# Altium PCB CAM_PW_V100.PcbDoc
Units mm, origin at the board's own origin, x right, y up, seen from the top; angles counter-clockwise.
Board outline 28.5 x 47.5 mm, 2 copper layers (Top Layer, Bottom Layer), stack 0.835 mm thick; 59 components, 53 nets, 239 pads, 33 vias.
Unrouted connection lines stored in the file: 136.
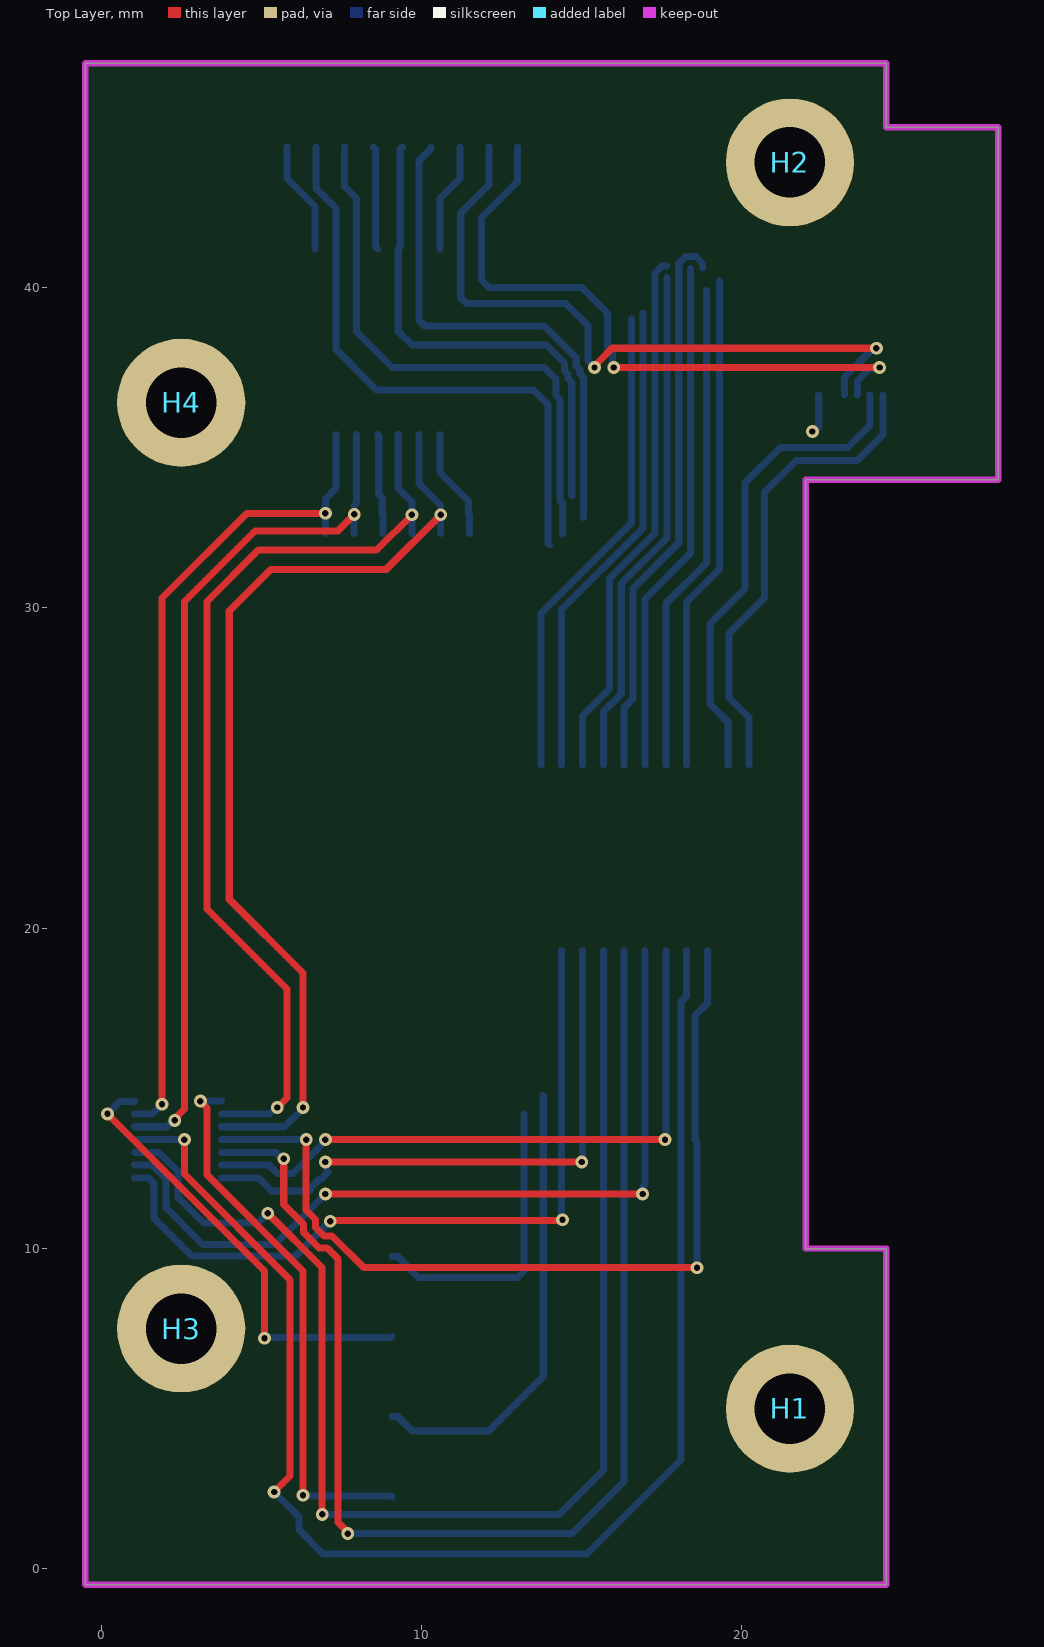
[diagram p0: Top Layer view]
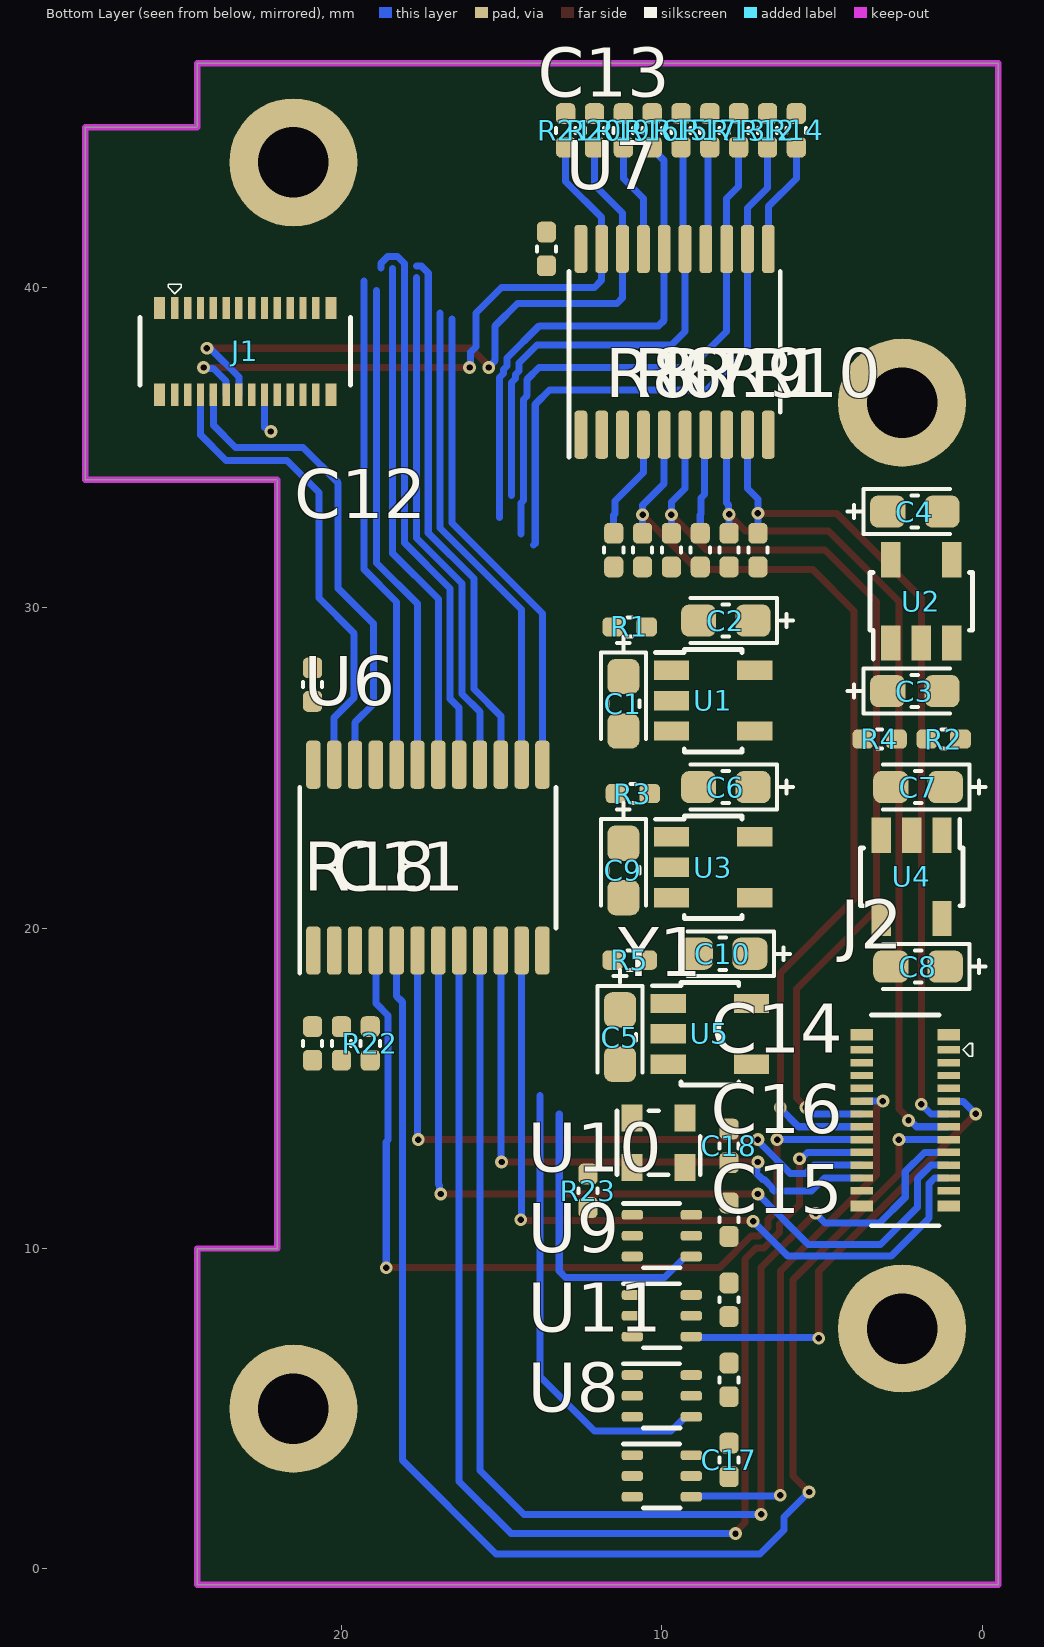
[diagram p1: Bottom Layer view, seen from below]

## Layer stack, top to bottom
Top Solder: solder mask 0.0102, Solder Resist, Dk 3.5
Top Layer: signal copper 0.0175
Dielectric 1: dielectric 0.8, FR-4, Dk 4.8
Bottom Layer: signal copper 0.0175
Bottom Solder: solder mask 0.0102, Solder Resist, Dk 3.5

## Board outline
-0.5,-0.5 -0.5,47 24.5,47 24.5,45 28,45 28,34 22,34 22,10 24.5,10 24.5,-0.5

## Design rules (kind name [scope] priority, off if disabled: settings)
Clearance [All] p1: gap=0.15 ignorepadtopadclearanceinfootprint=FALSE
HoleToHoleClearance [All] p1: gap=0.12 allowstackedmicrovias=TRUE
MinimumSolderMaskSliver [All] p1: minsoldermaskwidth=0.12
PolygonConnect [All] p1: connectstyle=Relief reliefconductorwidth=0.254 reliefentries=4 polygonreliefangle="90 Angle" airgapwidth=0.254
RoutingVias [All] p1: holewidth=0.2 width=0.4 viastyle="Through Hole" minholewidth=0.2 minwidth=0.4 maxholewidth=0.2 maxwidth=0.4
SilkToSilkClearance [All] p1: silktosilkclearance=0.12
SilkToSolderMaskClearance [IsPad] p1: minsilkscreentomaskgap=0.1 clearancetoexposedcopper=TRUE
SolderMaskExpansion [All] p1: expansion=0.102 istentingtop=FALSE
SupplyNets "Schematic Supply Nets_7" [InNet('+5V_CAM')] p1: voltage=0.000
SupplyNets "Schematic Supply Nets_6" [InNet('GND')] p2: voltage=0.000
SupplyNets "Schematic Supply Nets_5" [InNet('+1.05V')] p3: voltage=0.000
SupplyNets "Schematic Supply Nets_3" [InNet('+1.8V')] p4: voltage=0.000
SupplyNets "Schematic Supply Nets_2" [InNet('+3.3V')] p5: voltage=0.000
SupplyNets "Schematic Supply Nets_1" [InNet('+2.8V')] p6: voltage=0.000
SupplyNets "Schematic Supply Nets" [InNet('+2.4V')] p7: voltage=0.000
Width [All] p1: maxlimit=0.4 minlimit=0.15 preferedwidth=0.22
26 further rules are at their usual default settings.

## Components (designator, comment, footprint, x,y, rotation, side; value= is the part's Value field where it differs from the comment)
C1 "4.7uF/10V" CAP_MP_1608X90 11.2,27 r270 bottom
C2 "4.7uF/10V" CAP_MP_1608X90 8,29.6 r0 bottom
C3 "4.7uF/10V" CAP_MP_1608X90 2.1,27.4 r180 bottom
C4 "4.7uF/10V" CAP_MP_1608X90 2.1,33 r180 bottom
C5 "4.7uF/10V" CAP_MP_1608X90 11.3,16.6 r270 bottom
C6 "4.7uF/10V" CAP_MP_1608X90 8,24.4 r0 bottom
C7 "4.7uF/10V" CAP_MP_1608X90 2,24.4 r0 bottom
C8 "4.7uF/10V" CAP_MP_1608X90 2,18.8 r0 bottom
C9 "4.7uF/10V" CAP_MP_1608X90 11.2,21.8 r270 bottom
C10 "4.7uF/10V" CAP_MP_1608X90 8.1,19.2 r0 bottom
C11 "0.22uF/16V" CAP_C_1005X60 20,16.4 r90 bottom value=33pF
C12 "0.22uF/16V" CAP_C_1005X60 20.9,27.6 r270 bottom value=33pF
C13 "0.22uF/16V" CAP_C_1005X60 13.6,41.2 r90 bottom value=33pF
C14 "0.22uF/16V" CAP_C_1005X60 7.9,10.9 r270 bottom value=33pF
C15 "0.22uF/16V" CAP_C_1005X60 7.9,5.9 r270 bottom value=33pF
C16 "0.22uF/16V" CAP_C_1005X60 7.9,8.4 r270 bottom value=33pF
C17 "0.22uF/16V" CAP_C_1005X60 7.9,3.4 r270 bottom value=33pF
C18 "0.22uF/16V" CAP_C_1005X60 7.9,13.2 r270 bottom value=33pF
H1 "M2" HEX-2.2mm 21.5,5 r0 top locked
H2 "M2" HEX-2.2mm 21.5,43.9 r0 top locked
H3 "M2" HEX-2.2mm 2.5,7.5 r0 top locked
H4 "M2" HEX-2.2mm 2.5,36.4 r0 top locked
J1 "DF40C-24DP-0.4V51" CONN24_6P32X1P85_HDR_HIR 23,38 r0 bottom locked
J2 "DF40C-24DP-0.4V51" CONN24_6P32X1P85_HDR_HIR 2.4,14 r90 bottom locked
R1 "10k" RES_C_1005X40 11,29.4 r180 bottom
R2 "10k" RES_C_1005X40 1.2,25.9 r0 bottom
R3 "10k" RES_C_1005X40 10.9,24.2 r180 bottom
R4 "10k" RES_C_1005X40 3.2,25.9 r180 bottom
R5 "10k" RES_C_1005X40 11,19 r180 bottom
R6 "4.7k" RES_C_1005X40 10.6,31.8 r90 bottom
R7 "4.7k" RES_C_1005X40 9.7,31.8 r90 bottom
R8 "4.7k" RES_C_1005X40 11.5,31.8 r90 bottom
R9 "4.7k" RES_C_1005X40 7.9,31.8 r90 bottom
R10 "4.7k" RES_C_1005X40 7,31.8 r90 bottom
R11 "4.7k" RES_C_1005X40 8.8,31.8 r90 bottom
R12 "4.7k" RES_C_1005X40 6.7,44.9 r270 bottom
R13 "4.7k" RES_C_1005X40 7.6,44.9 r270 bottom
R14 "4.7k" RES_C_1005X40 5.8,44.9 r270 bottom
R15 "4.7k" RES_C_1005X40 9.4,44.9 r270 bottom
R16 "4.7k" RES_C_1005X40 10.3,44.9 r270 bottom
R17 "4.7k" RES_C_1005X40 8.5,44.9 r270 bottom
R18 "4.7k" RES_C_1005X40 20.9,16.4 r90 bottom
R19 "4.7k" RES_C_1005X40 11.2,44.9 r270 bottom
R20 "4.7k" RES_C_1005X40 12.1,44.9 r270 bottom
R21 "4.7k" RES_C_1005X40 13,44.9 r270 bottom
R22 "4.7k" RES_C_1005X40 19.1,16.4 r90 bottom
R23 "22R" RES_C_1005X40 12.3,11.8 r90 bottom
U1 "TLV75533PDBVR" SOT25 8.4,27.1 r180 bottom
U2 "TPS7A2024PDBVR" SOT25 1.9,30.2 r90 bottom
U3 "TLV75528PDBVR" SOT25 8.4,21.9 r180 bottom
U4 "AP7347DQ-105W5-7" SOT25 2.2,21.6 r270 bottom
U5 "TLV75518PDBVR" SOT25 8.5,16.7 r180 bottom
U6 "TCA6416APWR" SOP65P440W-24N 17.3,22.2 r90 bottom
U7 "PCA9544APW,118" SOP65P440W_20 9.6,38.3 r90 bottom
U8 "NL7SZ97DFT2G-Q" SC-88 10,2.9 r180 bottom
U9 "NL7SZ97DFT2G-Q" SC-88 10,7.9 r180 bottom
U10 "NL7SZ97DFT2G-Q" SC-88 10,10.4 r180 bottom
U11 "NL7SZ97DFT2G-Q" SC-88 10,5.4 r180 bottom
Y1 "DSC1001DL5-027.0000T" OSCDFN250X200X89-4N 10.1,13.3 r270 bottom

## Footprints (in the part's own frame and the unit in brackets; to place one, negate y for a bottom-side part, rotate by r counter-clockwise, add the part's x,y. Pads: shape width x height; smd on the part's side, far side on the other; paste and mask are expansions set on the pad)
CAP_C_1005X60 [mm]
  rrect50% 0.65x0.6 smd mask+0.05: 1(-0.525,0) 2(0.525,0)
  silkscreen extent -0.08,-0.3 0.08,0.3, body extent -0.5,-0.26 0.5,0.27, height 0.35
CAP_MP_1608X90 [mm] "Molded Capacitor, 2-Leads, Body 1.60x0.85mm, IPC Medium Density"
  rrect50% 1.1x1 smd mask+0.102: 1(-0.85,0) 2(0.85,0)
  silkscreen extent -2.1,-0.7 1.1,0.7, body extent -0.8,-0.43 0.8,0.43, height 1
CONN24_6P32X1P85_HDR_HIR [mm]
  rect 0.23x0.7 smd paste+0 mask+0: 1(2.2,-1.355) 2(2.2,1.355) 3(1.8,-1.355) 4(1.8,1.355) 5(1.4,-1.355) 6(1.4,1.355) 7(1,-1.355) 8(1,1.355) 9(0.6,-1.355) 10(0.6,1.355) 11(0.2,-1.355) 12(0.2,1.355) 13(-0.2,-1.355) 14(-0.2,1.355) 15(-0.6,-1.355) 16(-0.6,1.355) 17(-1,-1.355) 18(-1,1.355) 19(-1.4,-1.355) 20(-1.4,1.355) 21(-1.8,-1.355) 22(-1.8,1.355) 23(-2.2,-1.355) 24(-2.2,1.355)
  rect 0.35x0.7 smd paste-0.66 mask-0.66: 25(-2.675,1.355) 26(2.675,1.355) 27(-2.675,-1.355) 28(2.675,-1.355)
  silkscreen extent -3.29,-2.1 3.29,1.05, body extent -3.16,-1.48 3.16,1.49, height 1.14
HEX-2.2mm [mm]
  round 4 hole 2.2: 1(0,0)
OSCDFN250X200X89-4N [mm]
  rect 0.85x0.65 smd: 1(-0.775,0.825) 2(-0.775,-0.825) 3(0.775,-0.825) 4(0.775,0.825)
  silkscreen extent -1,-1.3 1,1.3, body extent -1.03,-1.27 1.03,1.27, height 0.89
RES_C_1005X40 [mm]
  rrect50% 0.65x0.6 smd mask+0.05: 1(-0.525,0) 2(0.525,0)
  silkscreen extent -0.08,-0.3 0.08,0.3, body extent -0.5,-0.25 0.5,0.25, height 0.38
SC-88 [mm] "6-TSSOP, SC-88, SOT-363 / SC-88/SC70-6/SOT-363"
  rrect50% 0.66x0.3 smd: 1(-0.92,0.65) 2(-0.92,0) 3(-0.92,-0.65) 4(0.92,-0.65) 5(0.92,0) 6(0.92,0.65)
  silkscreen extent -1.2,-1 0.58,1, body extent -1.05,-1 1.05,1, height 1.1
SOP65P440W-24N [mm] "TSSOP-24 4.40mm Width"
  rrect50% 1.5x0.45 smd: 1(-2.9,3.575) 2(-2.9,2.925) 3(-2.9,2.275) 4(-2.9,1.625) 5(-2.9,0.975) 6(-2.9,0.325) 7(-2.9,-0.325) 8(-2.9,-0.975) 9(-2.9,-1.625) 10(-2.9,-2.275) 11(-2.9,-2.925) 12(-2.9,-3.575) 13(2.9,-3.575) 14(2.9,-2.925) 15(2.9,-2.275) 16(2.9,-1.625) 17(2.9,-0.975) 18(2.9,-0.325) 19(2.9,0.325) 20(2.9,0.975) 21(2.9,1.625) 22(2.9,2.275) 23(2.9,2.925) 24(2.9,3.575)
  silkscreen extent -3.6,-4 2.2,4, body extent -3.2,-3.9 3.2,3.9, height 1.2
SOP65P440W_20 [mm] "TSSOP 20 4.40mm Width"
  rrect50% 1.5x0.4 smd paste+0 mask+0: 1(-2.9,2.925) 2(-2.9,2.275) 3(-2.9,1.625) 4(-2.9,0.975) 5(-2.9,0.325) 6(-2.9,-0.325) 7(-2.9,-0.975) 8(-2.9,-1.625) 9(-2.9,-2.275) 10(-2.9,-2.925) 11(2.9,-2.925) 12(2.9,-2.275) 13(2.9,-1.625) 14(2.9,-0.975) 15(2.9,-0.325) 16(2.9,0.325) 17(2.9,0.975) 18(2.9,1.625) 19(2.9,2.275) 20(2.9,2.925)
  silkscreen extent -3.6,-3.3 2.2,3.3, body extent -3.3,-3.3 3.3,3.3, height 1.09
SOT25 [mm]
  rect 1.1x0.6 smd paste+0 mask+0: 1(-1.3,0.95) 2(-1.3,0) 3(-1.3,-0.95) 4(1.3,-0.95) 5(1.3,0.95)
  silkscreen extent -1.8,-1.6 0.9,1.6, body extent -1.43,-1.5 1.43,1.5, height 1.4

## Part data
C1 C2 C3 C4 C5 C6 C7 C8 C9 C10: library part CAP_TH, "CAP_Polarization", LatestRevisionDate=17-Jul-2002, LatestRevisionNote="Re-released for DXP Platform.", PackageReference=POLAR0.8, Published=8-Jun-2000, Publisher="Altium Limited"
C11 C12 C13 C14 C15 C16 C17 C18: library part CAP_SMD, "CAP_Chip"
H1 H2 H3 H4: library part HEX-M3
J1 J2: "No Description Available", Mfr_Name=Hirose, RefDes=RefDes, TYPE=Type
R1 R2 R3 R4 R5 R6 R7 R8 R9 R10 R11 R12 R13 R14 R15 R16 R17 R18 R19 R20 R21 R22 R23: library part RES-SMD, "RES-Chip", Manufacturer="Generic Components", Class=Passive, Published=08/06/2000, Publisher="Altium Hobart Technology Centre"
U1 U2 U3 U4 U5: library part IC_POWER_AP7347DQ
U6: library part IC_I2Cto16IO_TCA6416APWR
U7: library part IC_I2CSW1to4_PCA9544APW,118
U8 U9 U10 U11: library part IC_FLEXLOGIC_NL7SZ97DFT2G-Q
Y1: library part Y_OSC27MHz_DSC1001DL5-027.0000T

## Via types
v1: diameter 0.4, hole 0.2, Top Layer to Bottom Layer, 33 vias

## Nets (pads, with @x,y where several pads share a name; then routed paths per layer and width w, separated by ;. In a path a pad name is that pad's centre, name@x,y a point inside that pad or via, vN(x,y) a via of type N, cw(c..) or ccw(c..) an arc to the next point about the centre after c; other vN are vias at no path point)
+1.05V: C8.1 J2.6 J2.8 U4.5
+1.8V: C10.1 C12.2 C14.2 C15.2 C16.2 C17.2 J2.2 J2.4 U5.5 U6.24 U8.5 U9.5 U10.5 U11.5
+2.4V: C4.1 C13.2 R6.1 R7.1 R8.1 R9.1 R10.1 R11.1 R12.1 R13.1 R14.1 R15.1 R16.1 R17.1 R19.1 R20.1 R21.1 U2.5 U7.20
+2.8V: C6.1 J2.1 J2.3 U3.5
+3.3V: C2.1 C3.1 C7.1 C11.2 C18.2 R2.2 R4.2 R18.1 R22.1 U1.5 U2.1 U4.1 U6.2 Y1.1 Y1.4
+5V_CAM: C1.1 C5.1 C9.1 J1.2 J1.4 R1.2 R3.2 R5.2 U1.1 U3.1 U5.1
CAM_SCL: J1.12 R20.2 U7.18 | length 21.8
  Top Layer w0.22: v1(15.4,37.5) 15.4,37.549 15.54,37.689 15.54,37.691 15.949,38.1 v1(24.2,38.1)
  Bottom Layer w0.22: R20.2 12.1,43.2 11.225,42.325 U7.18 11.225,39.675 11.4,39.5 14.5,39.5 15.2,38.8 15.2,37.719 15.4,37.519 v1(15.4,37.5) v1@15.43,37.47 ; J1.12 23.2,37.201 24.099,38.1 v1(24.2,38.1)
CAM_SDA: J1.10 R21.2 U7.19 | length 20.4
  Top Layer w0.22: v1(16,37.5) v1(24.3,37.5)
  Bottom Layer w0.22: R21.2 13,43.3 11.875,42.175 U7.19 11.875,40.225 12.1,40 15,40 15.8,39.2 15.8,38.14 15.966,37.974 15.966,37.534 v1(16,37.5) ; J1.10 23.605,36.65 23.605,37.083 23.988,37.466 24.266,37.466 v1(24.3,37.5)
CM4_SCL: J1.8 U6.22 | length 15.1
  Bottom Layer w0.22: U6.22 19.575,26.425 19,27 19,29.5 20.1,30.6 20.1,33.9 21.2,35 23.3,35 23.995,35.695 23.995,36.64 J1.8
CM4_SDA: J1.6 U6.23 | length 14.9
  Bottom Layer w0.22: U6.23 20.225,26.575 19.6,27.2 19.6,29.2 20.7,30.3 20.7,33.6 21.7,34.6 23.6,34.6 24.4,35.4 J1.6
GND: C1.2 C2.2 C3.2 C4.2 C5.2 C6.2 C7.2 C8.2 C9.2 C10.2 C11.1 C12.1 C13.1 C14.1 C15.1 C16.1 C17.1 C18.1 J1.1 J1.3 J1.14 J1.19 J2.5 J2.7 J2.23 J2.24 U1.2 U2.2 U3.2 U4.2 U5.2 U6.12 U6.21 U7.1 U7.2 U7.3 U7.10 U8.2 U8.3 U8.6 U9.2 U9.3 U9.6 U10.2 U10.3 U10.6 U11.2 U11.3 U11.6 Y1.2
NetR1_1: R1.1 U1.3
NetR2_1: R2.1 U2.3
NetR3_1: R3.1 U3.3
NetR4_1: R4.1 U4.3
NetR5_1: R5.1 U5.3
NetR18_2: R18.2 U6.1
NetR22_2: R22.2 U6.3
NetR23_1: R23.1 U8.1 U9.1 U10.1 U11.1
NetR23_2: R23.2 Y1.3
nINT: R19.2 U7.17 | length 3.4
  Bottom Layer w0.22: U7.17 10.575,42.775 11.2,43.4 R19.2
nINT0: R8.2 U7.4 | length 3.5
  Bottom Layer w0.22: U7.4 10.575,34.225 11.466,33.334 11.466,32.934 11.5,32.9 R8.2
nINT1: R11.2 U7.7 | length 3.1
  Bottom Layer w0.22: U7.7 8.666,35.359 8.666,33.54 8.776,33.43 8.776,32.924 8.8,32.9 R11.2
nINT2: R14.2 U7.11 | length 3.5
  Bottom Layer w0.22: R14.2 5.8,43.4 6.675,42.525 U7.11
nINT3: R17.2 U7.14 | length 3.2
  Bottom Layer w0.22: R17.2 8.563,44.312 8.563,41.262 U7.14
SEN_0_CLK: J2.10 U8.4 | length 17.1
  Top Layer w0.22: v1(3.1,14.6) 3.1,14.581 3.3,14.381 3.3,12.3 6.3,9.3 v1(6.3,2.3)
  Bottom Layer w0.22: v1(3.1,14.6) J2.10 ; v1(6.3,2.3) 6.325,2.275 9.055,2.275 U8.4
SEN_0_GPIO0: J2.16 U6.4 | length 28
  Top Layer w0.22: v1(6.4,13.4) 6.4,11.2 6.69,10.91 6.69,10.659 6.959,10.39 7.21,10.39 8.2,9.4 v1(18.6,9.4)
  Bottom Layer w0.22: J2.16 v1(6.4,13.4) ; v1(18.6,9.4) 18.6,13.329 18.54,13.389 18.54,17.27 18.925,17.655 U6.4
SEN_0_GPIO1: J2.18 U6.8 | length 40.6
  Top Layer w0.22: v1(5.7,12.8) 5.7,11.377 6.32,10.757 6.32,10.506 6.806,10.02 7.057,10.02 7.4,9.677 7.4,1.449 7.7,1.149 v1(7.7,1.1)
  Bottom Layer w0.22: J2.18 5.451,13 5.651,12.8 v1(5.7,12.8) ; v1(7.7,1.1) 14.7,1.1 16.325,2.725 U6.8
SEN_0_GPIO2: J2.20 U6.6 | length 20.3
  Top Layer w0.22: v1(7,13.4) v1(17.6,13.4)
  Bottom Layer w0.22: J2.20 5.249,12.6 5.509,12.34 5.991,12.34 6.86,13.209 6.86,13.211 7,13.351 v1(7,13.4) ; v1(17.6,13.4) 17.625,13.425 U6.6
SEN_0_nOFF: J2.22 U6.10 | length 18.7
  Top Layer w0.22: v1(7.001,12.699) v1(15,12.7)
  Bottom Layer w0.22: J2.22 4.922,12.2 5.322,11.8 6.5,11.8 6.54,11.84 6.54,11.891 6.809,12.16 6.86,12.16 7.091,12.391 7.035,12.446 7.035,12.665 v1(7.001,12.699) ; v1(15,12.7) 15.025,12.725 U6.10
SEN_0_SCL: J2.12 R7.2 U7.6 | length 29.6
  Top Layer w0.22: v1(5.5,14.4) 5.8,14.7 5.8,18.1 3.3,20.6 3.3,30.194 4.906,31.8 8.6,31.8 v1(9.7,32.9)
  Bottom Layer w0.22: J2.12 5.251,14.2 5.451,14.4 v1(5.5,14.4) ; U7.6 9.275,33.725 9.7,33.3 v1(9.7,32.9) R7.2
SEN_0_SDA: J2.14 R6.2 U7.5 | length 30.5
  Top Layer w0.22: v1(6.3,14.4) 6.3,18.6 4,20.9 4,29.9 5.3,31.2 8.9,31.2 v1(10.6,32.9)
  Bottom Layer w0.22: J2.14 5.728,13.8 v1@6.314,14.386 ; U7.5 9.925,33.875 10.595,33.205 10.595,32.905 v1(10.6,32.9) R6.2
SEN_1_CLK: J2.9 U9.4 | length 14
  Top Layer w0.22: v1(0.2,14.2) 5.1,9.3 v1(5.1,7.2)
  Bottom Layer w0.22: v1(0.2,14.2) 0.595,14.595 1.04,14.595 J2.9 ; v1(5.1,7.2) 5.125,7.225 9.055,7.225 U9.4
SEN_1_GPIO0: J2.15 U6.5 | length 45
  Top Layer w0.22: v1(2.6,13.4) 2.6,12.323 5.9,9.023 5.9,2.9 v1(5.4,2.4)
  Bottom Layer w0.22: J2.15 v1(2.6,13.4) ; v1(5.4,2.4) 6.182,1.618 6.182,1.218 6.93,0.47 15.17,0.47 18.1,3.4 18.1,17.7 18.275,17.875 U6.5
SEN_1_GPIO1: J2.17 U6.9 | length 41.3
  Top Layer w0.22: v1(5.2,11.1) 5.203,11.1 6.9,9.403 v1(6.9,1.7)
  Bottom Layer w0.22: J2.17 1.8,13 2.4,12.4 2.4,11.6 3.2,10.8 4.9,10.8 v1(5.2,11.1) ; v1(6.9,1.7) 14.3,1.7 15.675,3.075 U6.9
SEN_1_GPIO2: J2.19 U6.7 | length 25.7
  Top Layer w0.22: v1(7,11.7) v1(16.9,11.7)
  Bottom Layer w0.22: J2.19 1.601,12.6 2.025,12.176 2.025,11.275 3.17,10.13 5.43,10.13 v1(7,11.7) ; v1(16.9,11.7) 16.934,11.734 16.934,11.959 16.975,12 U6.7
SEN_1_nOFF: J2.21 U6.11 | length 23.9
  Top Layer w0.22: v1(7.15,10.85) 7.175,10.875 14.375,10.875 v1(14.4,10.9)
  Bottom Layer w0.22: J2.21 1.05,12.195 1.483,12.195 1.655,12.023 1.655,11.577 1.655,10.945 2.84,9.76 6.06,9.76 v1(7.15,10.85) ; U6.11 14.375,10.925 v1(14.4,10.9)
SEN_1_SCL: J2.11 R10.2 U7.9 | length 26.2
  Top Layer w0.22: v1(1.9,14.5) 1.9,30.3 4.549,32.949 v1(7,32.949)
  Bottom Layer w0.22: J2.11 1.6,14.2 v1(1.9,14.5) ; R10.2 v1(7,32.949) 7,33.4 7.325,33.725 U7.9
SEN_1_SDA: J2.13 R9.2 U7.8 | length 27.2
  Top Layer w0.22: v1(2.3,14) 2.3,14.049 2.6,14.349 2.6,30.2 4.8,32.4 7.388,32.4 v1(7.9,32.913)
  Bottom Layer w0.22: J2.13 2.051,13.8 2.251,14 v1(2.3,14) ; R9.2 v1(7.9,32.913) 7.911,32.924 7.911,33.211 7.975,33.275 U7.8
SEN_2_CLK: J1.16 U10.4 | length 10.6
  Bottom Layer w0.22: U10.4 9.26,9.75 9.91,9.1 13,9.1 13.2,9.3 13.2,14.2 ; v1(22.2,35.5) 22.249,35.5 22.378,35.629 22.4,35.629 J1.16
SEN_2_GPIO0: J1.22 U6.13 | length 15.1
  Bottom Layer w0.22: U6.13 13.725,29.816 16.55,32.641 16.55,39.018
SEN_2_GPIO1: J1.24 U6.17 | length 17.4
  Bottom Layer w0.22: U6.17 16.325,26.878 16.605,27.158 16.605,30.603 18.03,32.028 18.03,40.749 18.247,40.965 18.553,40.965 18.77,40.749 18.77,40.6
SEN_2_GPIO2: J1.21 U6.15 | length 16.8
  Bottom Layer w0.22: U6.15 15.025,26.625 15.865,27.465 15.865,30.909 17.29,32.334 17.29,40.453 17.507,40.67 17.66,40.67
SEN_2_nOFF: J1.23 U6.19 | length 15.3
  Bottom Layer w0.22: U6.19 17.625,30.125 18.9,31.4 18.9,39.9
SEN_2_SCL: J1.18 R13.2 U7.13 | length 17.7
  Bottom Layer w0.22: R13.2 7.6,43.144 7.975,42.769 U7.13 7.975,38.625 9.1,37.5 13.83,37.5 14.2,37.13 14.2,36.623 14.32,36.503 14.32,33.347 14.4,33.267 14.4,32.3
SEN_2_SDA: J1.20 R12.2 U7.12 | length 18.3
  Bottom Layer w0.22: R12.2 6.7,43.1 7.325,42.475 U7.12 7.325,38.075 8.6,36.8 13.5,36.8 13.95,36.35 13.95,32.004 14,31.954
SEN_3_CLK: J1.5 U11.4 | length 14.4
  Bottom Layer w0.22: U11.4 9.26,4.75 9.71,4.3 12.1,4.3 13.8,6 13.8,14.781
SEN_3_GPIO0: J1.11 U6.14 | length 15.2
  Bottom Layer w0.22: U6.14 14.375,29.943 16.92,32.488 16.92,39.2
SEN_3_GPIO1: J1.13 U6.18 | length 16.1
  Bottom Layer w0.22: U6.18 16.975,30.275 18.4,31.7 18.4,40.595
SEN_3_GPIO2: J1.15 U6.16 | length 16
  Bottom Layer w0.22: U6.16 15.675,26.752 16.235,27.312 16.235,30.756 17.66,32.181 17.66,40.3
SEN_3_nOFF: J1.17 U6.20 | length 15.5
  Bottom Layer w0.22: U6.20 18.275,30.175 19.3,31.2 19.3,40.2
SEN_3_SCL: J1.7 R16.2 U7.16 | length 16
  Bottom Layer w0.22: R16.2 10.3,44.328 9.925,43.953 U7.16 9.925,38.975 10.1,38.8 13.823,38.8 14.83,37.793 14.83,37.547 14.94,37.437 14.94,37.309 15.06,37.189 15.06,32.822
SEN_3_SDA: J1.9 R15.2 U7.15 | length 15.6
  Bottom Layer w0.22: R15.2 9.337,44.312 9.337,41.262 U7.15 9.275,38.625 9.7,38.2 13.9,38.2 14.46,37.64 14.46,37.393 14.57,37.283 14.57,37.156 14.69,37.036 14.69,33.5
pads on no net: H1.1 H2.1 H3.1 H4.1 J1.25 J1.26 J1.27 J1.28 J2.25 J2.26 J2.27 J2.28 U1.4 U2.4 U3.4 U4.4 U5.4

## Keep-outs
Keep-Out Layer:
  the board outline again, w0.2

## Silkscreen, mask and mechanical layers (free items; w line width, h text height)
Mechanical 1:
  lines w0.05: 4.6,19 4.6,18 ; 5.3,40.5 5.3,44.3 3.1,44.3 3.1,40.5 6.1,40.5 6.1,30.3 3.7,30.3 3.7,34.1 4.9,34.1 4.9,38.1 6.1,38.1 6.1,25.5 6,25.5 6,25.6 5.1,25.6 5.1,27.8 5.1,27.7 6.1,27.7 6.1,24.5 ; 12.1,25.7 18.7,25.7 18.7,28 19.6,28 19.6,30.2 16.7,30.2 ; 13,21.6 13,25.7 12,25.7 12,18.6 12.3,18.6 ; 13.1,10.7 13.1,10.6 ; 14.3,39.4 14.3,43.6 16.5,43.6 16.5,41.7 ; 14.3,41.6 16.5,41.6 ; 16.3,30.5 16.3,30.6 14.3,30.6 14.3,36.3 13,36.3 13,38.5 14.1,38.5 14.1,39.4 16.3,39.4 16.3,30.2 16.7,30.2 ; 16.5,5.1 16.4,5.1 16.4,10.6 ; 18.6,27 18.6,26.9 16.7,26.9 16.7,30.2 ; 4.6,18 0.2,18 0.2,18.1 0.2,10 5.3,10 5.3,9.9 5.3,8.7 6.2,8.7 6.2,8.8 6.2,6.6 ; 4.6,18 4.6,14.6 4.5,14.6 4.5,14.5 7,14.5 7,10.9 7.2,10.9 7.2,10.7 7.2,6.6 7.1,6.6 6.2,6.6 ; 6.1,24.5 6.1,19.1 6.1,19 4.1,19 4.1,24.6 4,24.6 4.1,24.5 6.1,24.5 ; 6.2,5.1 6.2,0.1 11.5,0.1 11.6,0.2 11.6,1.5 17.7,1.5 17.7,1.4 17.6,1.4 17.6,5.1 12.4,5.1 12.4,1.7 11.4,1.7 11.5,1.7 11.5,1.2 7.3,1.2 7.3,1.1 7.2,1.1 7.2,5.1 6.3,5.1 6.2,5.1 ; 6.2,5.1 6.2,6.6 ; 12.3,18.6 15.2,18.6 15.2,18.5 15.3,18.5 15.3,16.6 16.5,16.6 16.5,16.4 16.4,16.4 16.4,10.6 ; 12.3,18.6 12.3,13.5 13,13.5 13,10.6 13.1,10.6 ; 13.1,10.6 16.4,10.6
Top Courtyard:
  lines w0.2: 5.9,46.4 12.1,46.4 ; 6,0 16,0 ; 27.4,34.5 21.5,34.5 21.5,9.5 23.9,9.5 ; 23.9,9.5 23.9,0 0,0 0,46.4 24,46.4 24,44.3 27.4,44.3 27.4,9.5 23.9,9.5

## Text inside footprints (layer, text, board x,y; h text height)
U7: Bottom Component Outline "*" at 11.556,36.116 h1.27 r270